# EAGLE board JoystickBulkBoard (EAGLE 9.0.0)
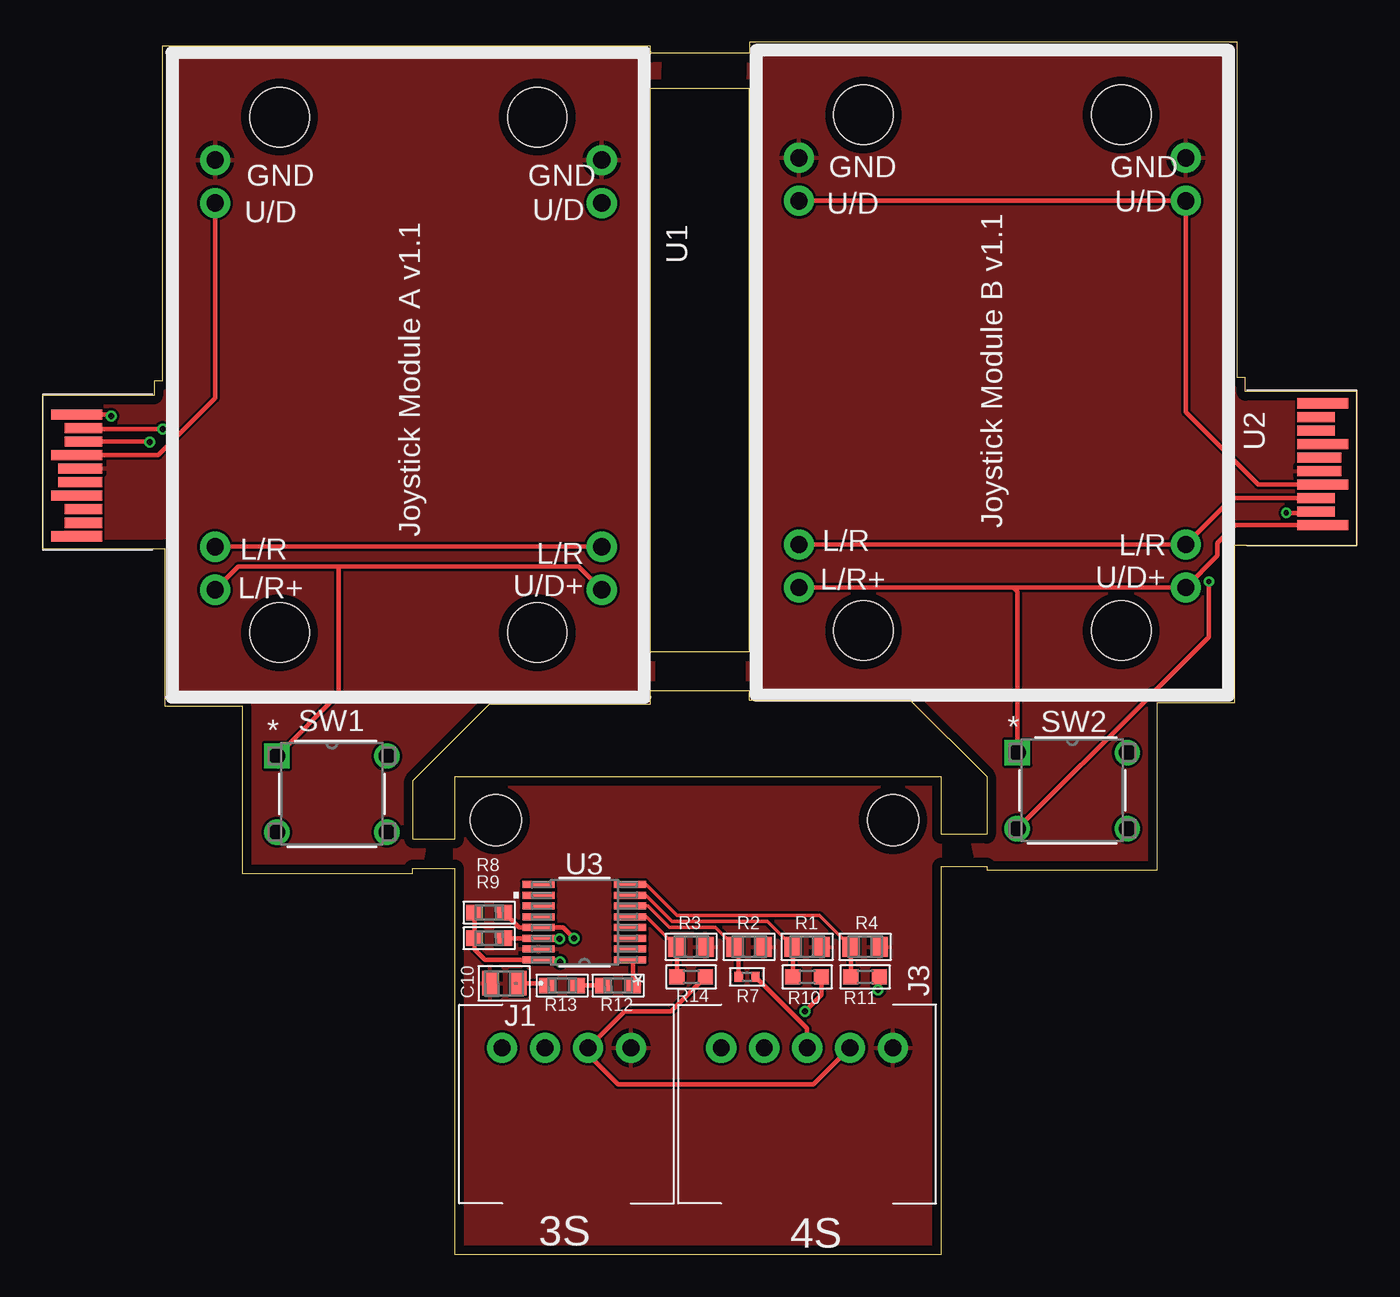
[diagram p0: board, top side]
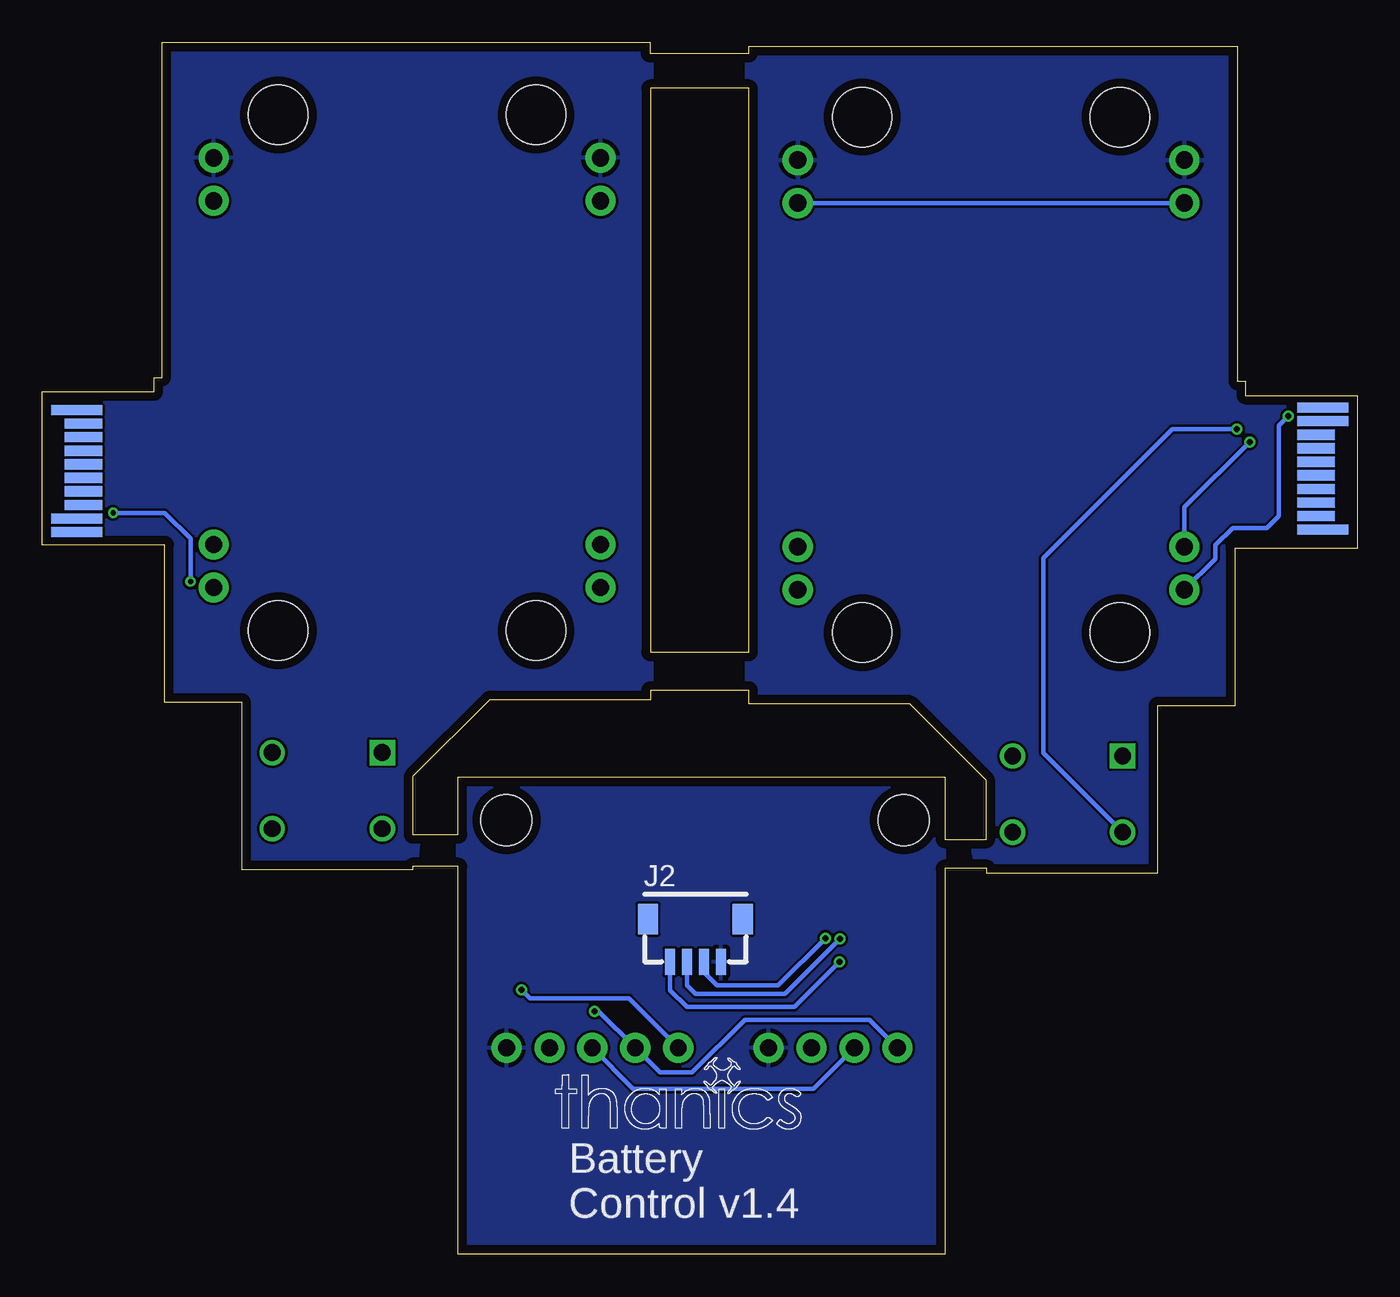
[diagram p1: board, bottom side, seen from below]

Size 77.72 x 71.65 mm. Coordinates in mm from the lower left corner, seen from the top.
Outline: 7.09,71.42 7.09,51.61 6.6,51.61 6.6,50.77 0,50.77 0,41.73 7.24,41.73 7.24,32.44 11.81,32.44 11.81,22.53 21.9,22.53 21.9,22.81 24.38,22.81 24.38,0 53.14,0 53.14,22.94 55.83,22.94 55.83,22.73 65.91,22.73 65.91,32.64 70.48,32.64 70.48,41.94 77.72,41.94 77.72,51 71.12,51 71.12,51.84 70.64,51.84 70.64,71.65 41.81,71.65 41.81,70.99 35.97,70.99 35.97,71.42 7.09,71.42
Outline: 35.97,68.94 41.78,68.94 41.78,35.61 35.97,35.61 35.97,68.94
Outline: 35.97,33.35 41.78,33.35 41.78,32.79 51.28,32.79 55.83,28.24 55.83,24.82 53.14,24.82 53.14,28.22 24.38,28.22 24.38,24.54 21.92,24.54 21.92,28.02 26.44,32.54 35.97,32.54 35.97,33.35
Copper layers (1*16): Top 0.035mm / dielectric 1.6mm / Bottom 0.035mm
Design rules "Elecrow_2-layer_PCB_eagle_rule": minimum track width 6mil, minimum drill 12mil, track to track 6mil, track to pad 6mil, pad to pad 6mil, via to via 8mil, smd to smd 0mil, copper to edge 20mil, drill to drill 10mil, minimum pad ring 6mil, minimum via ring 6mil, stop-mask expansion 0mil, vias tented up to drill 100mil, thermal gap 10mil
Holes 3 mm at 50.29,25.68 26.8,25.68

## Footprints (pad centres in the part's own frame; a part is rotated, then mirrored left to right if it is on the bottom)
0805 = smd 0.965 x 1.448: 1 -0.826,0; 2 0.826,0
JST-XH_4POS = drill 1 pad 1.778: 1 0,3.81; 2 0,1.27; 3 0,-1.27; 4 0,-3.81
JST_SH_4POS = smd 0.6 x 1.55: 1 -1.5,0; 2 -0.5,0; 3 0.5,0; 4 1.5,0 | smd 1.2 x 1.8: P$5 -2.8,2.525; P$6 2.8,2.525
JST-XH_5POS = drill 1 pad 1.778: 1 0,5.08; 2 0,2.54; 3 0,0; 4 0,-2.54; 5 0,-5.08
RC0805N = smd 1.006 x 1.2: 1 -0.853,0; 2 0.853,0
R0402 = smd 0.5 x 0.6: 1 -0.5,0; 2 0.5,0
RC0603N-M = smd 0.965 x 0.914: 1 -0.876,0; 2 0.876,0
R0603 = smd 0.9 x 0.9: 1 -0.85,0; 2 0.85,0
SW4_1825910-G = drill 0.991 pad 1.499 square: 1 -6.502,4.496 | drill 0.991 pad 1.499: 2 0,4.496; 3 -6.502,0; 4 0,0
27800-JOYSTICK = drill 1.016 pad 1.778: 1 -11.43,12.7; 2 -11.43,10.16; 3 11.43,12.7; 4 11.43,10.16; 5 -11.43,-10.16; 6 -11.43,-12.7; 7 11.43,-10.16; 8 11.43,-12.7 | hole 3.5: -7.62,15.24; 7.62,15.24; -7.62,-15.24; 7.62,-15.24
21-0055H_16-M = smd 1.905 x 0.406: 1 -2.705,2.223; 2 -2.705,1.587; 3 -2.705,0.953; 4 -2.705,0.318; 5 -2.705,-0.318; 6 -2.705,-0.953; 7 -2.705,-1.587; 8 -2.705,-2.223; 9 2.705,-2.223; 10 2.705,-1.587; 11 2.705,-0.953; 12 2.705,-0.318; 13 2.705,0.318; 14 2.705,0.953; 15 2.705,1.587; 16 2.705,2.223
EDGE_CONNECTOR_20POS_CONTACTS = smd 0.6 x 3 bottom: 1 -3.4,0; 9 3,0; 10 3.8,0 | smd 0.6 x 2.2 bottom: 2 -2.6,-0.4; 3 -1.8,-0.4; 4 -1,-0.4; 5 -0.2,-0.4; 6 0.6,-0.4; 7 1.4,-0.4; 8 2.2,-0.4 | smd 0.6 x 3: 11 3.4,0; 14 1,0; 17 -1.4,0; 20 -3.8,0 | smd 0.6 x 2.2: 12 2.6,-0.4; 13 1.8,-0.4; 18 -2.2,-0.4; 19 -3,-0.4 | smd 0.6 x 2.6: 15 0.2,-0.2; 16 -0.6,-0.2

## Placement (x,y rotation side)
C10  0.1uF  [0805]  27.3,16.03 180 top
J1  JST-XH_4POS  [JST-XH_4POS]  30.99,12.22 90 top
J2  [JST_SH_4POS]  39.12,17.3 0 bottom
J3  JST-XH_5POS  [JST-XH_5POS]  45.21,12.22 90 top
R1  10k 0.1%  [RC0805N]  45.21,18.19 180 top
R2  10k 0.1%  [RC0805N]  41.78,18.19 180 top
R3  10k 0.1%  [RC0805N]  38.35,18.19 180 top
R4  10k 0.1%  [RC0805N]  48.64,18.19 180 top
R7  15.6k  [R0402]  41.66,16.41 0 top
R8  1k  [RC0603N-M]  26.42,20.22 0 top
R9  1k  [RC0603N-M]  26.42,18.69 0 top
R10  28.4k  [R0603]  45.21,16.41 0 top
R11  41.2k  [R0603]  48.64,16.41 0 top
R12  1k  [RC0603N-M]  34.04,15.9 180 top
R13  1k  [RC0603N-M]  30.73,15.9 180 top
R14  2.74k  [R0603]  38.35,16.41 0 top
SW1  2-1825910-7  [SW4_1825910-G]  20.37,24.97 0 top
SW2  2-1825910-7  [SW4_1825910-G]  64.14,25.17 0 top
U1  27800-JOYSTICK  [27800-JOYSTICK]  21.64,51.99 180 top
U2  27800-JOYSTICK  [27800-JOYSTICK]  56.16,52.12 180 top
U3  MAX11608EEE+21-0055H_16-M  [21-0055H_16-M]  32.04,19.65 180 top
U$1  EDGE_CONNECTOR_20POS_CONTACTS  [EDGE_CONNECTOR_20POS_CONTACTS]  75.69,46.51 270 top
U$2  EDGE_CONNECTOR_20POS_CONTACTS  [EDGE_CONNECTOR_20POS_CONTACTS]  2.03,46.25 90 top

## Library data of the parts
C10 = Controller Board; COPYRIGHT: Copyright C 2015 Accelerated Designs. All rights reserved; MANUFACTURER_PART_NUMBER: 08055C104KAT2A; VENDOR: Vendor
J1 J3 = thanics-connector
J2 U1 U2 U$1 U$2 = thanics_robotics
R1-R4 = 10k-resistor; CASE: 0805 2012 metric; COMPOSITION: Thin Film; COPYRIGHT: Copyright C 2015 Accelerated Designs. All rights reserved; DATASHEET: httpindustrial.panasonic.comwwwcgijvcr13pz.cgi?E+PZ+3+AOA0026+ERA6AEB103V+7+WW; DIGIKEYPARTNUMBER: P10KDATRND; HEIGHT: 0.024" 0.60mm; LEADSTYLE: Surface Mount SMD SMT; MANUFACTURER_PART_NUMBER: ERA6AEB103V; NUMBEROFTERMINATIONS: 2; PACKAGECASE: 0805 2012 Metric; PACKAGING: Tape &amp Reel TR; POWERWATTS: 0.125W 18W; QUANTITY_AVAILABLE: 225000; RESISTANCEINOHMS: 10.0K; RESISTANCEOHMS: 10K; SIZEDIMENSION: 0.079" L x 0.049" W 2.00mm x 1.25mm; TEMPERATURECOEFFICIENT: 25ppm°C; TOLERANCE: 0.1%; VENDOR: Panasonic; VOLTAGEWORKING: 100V
R7 R10 R11 R14 = thanics-resistor; TOLERANCE: 0.1%
R8 R9 R12 R13 = Controller Board; CASE: 0603 1608 metric; COMPOSITION: Thick Film; COPYRIGHT: Copyright C 2015 Accelerated Designs. All rights reserved; DATASHEET: httpwww.yageo.comdocumentsrecentPYuRC0603_51_RoHS_L_4.pdf; DESCRIPTION: RES 1.0K OHM 110W 5% 0603 SMD; DIGIKEYPARTNUMBER: 3111.0KGRTRND; HEIGHT: 0.022" 0.55mm; LEADSTYLE: Surface Mount SMD SMT; MANUFACTURER_PART_NUMBER: RC0603JR071KL; NEWARKPARTNUMBER: 14M7231; NUMBEROFTERMINATIONS: 2; PACKAGECASE: 0603 1608 Metric; PACKAGING: Tape &amp Reel TR; POWERWATTS: 0.1W 110W; QUANTITY_AVAILABLE: 0; RESISTANCEINOHMS: 1.00K; RESISTANCEOHMS: 1K; SIZEDIMENSION: 0.063" L x 0.031" W 1.60mm x 0.80mm; TEMPERATURECOEFFICIENT: 100ppm°C; TOLERANCE: 5%; VENDOR: Yageo; VOLTAGEWORKING: 50V
SW1 SW2 = spst-tactile-switch; MANUFACTURER_PART_NUMBER: 218259107; VENDOR: TE Connectivity
U3 = 8ch ADC; COPYRIGHT: Copyright C 2015 Accelerated Designs. All rights reserved; DATAINTERFACE: I²C Serial; DATASHEET: httpdatasheets.maximic.comendsMAX11606MAX11611.pdf; DESCRIPTION: IC ADC SERIAL 10BIT 8CH 16QSOP; DIGIKEYPARTNUMBER: MAX11608EEE+ND; MANUFACTURER_PART_NUMBER: MAX11608EEE+; MOUNTINGTYPE: Surface Mount; NUMBEROFBITS: 10; NUMBEROFCONVERTERS: 1; NUMBEROFINPUTSANDTYPE: 8 SingleEnded Unipolar 8 SingleEnded Bipolar 4 Differential Unipolar 4 Differential Bipolar; OPERATINGTEMPERATURE: 40°C ~ 85°C; PACKAGECASE: 16SSOP 0.154" 3.90mm Width; PACKAGING: Tube; POWERDISSIPATIONMAX: 666.7mW; QUANTITY_AVAILABLE: 814; SAMPLINGRATEPERSECOND: 94.4k; SUPPLIERDEVICEPACKAGE: 16QSOP; VENDOR: Maxim Integrated Products; VOLTAGESUPPLYSOURCE: Single Supply

## Nets
+3V1: SW2.1 U2.1 U2.3 U$1.11
+3V2: J2.1 R8.1 R9.1 U3.16
+3V3: SW1.1 U1.1 U1.3 U$2.11
C1: R3.2 R14.1 U3.5
C2: R2.2 R7.1 U3.6
C3: R1.2 R10.1 U3.7
C4: R4.2 R11.1 U3.8
GND: U1.6 U1.8 U$2.15
GND1: U2.6 U2.8 U$1.15
GND2: C10.2 J1.4 J2.4 J3.5 R1.1 R2.1 R3.1 R4.1 U3.15
I2C_SCL: J2.3 R8.2 U3.13
I2C_SDA: J2.2 R9.2 U3.14
J2_SW: SW1.3 U$2.12
J2_SW1: SW2.3 U$1.12
N$1: R12.1 U3.1
N$8: J1.3 J3.4 R14.2
N$10: J1.2 J3.3 R7.2
N$13: J1.1 J3.2 R10.2
N$16: J3.1 R11.2
N$24: R12.2 R13.1
N$28: C10.1 R13.2
VRX: U1.2 U1.4 U$2.13
VRX1: U2.2 U2.4 U$1.13
VRY: U1.5 U1.7 U$2.14
VRY1: U2.5 U2.7 U$1.14

## Tracks (layer width: path | path; a pad name or v marks a point on that pad's centre or on a via)
+3V1
  Top 0.254: U$1.11 70.51,43.11 69.47,42.06 69.47,41.3 U2.1 57.4,39.42 | U2.3 57.4,39.42 | SW2.1 57.63,39.19 57.4,39.42
+3V2  (via drill 0.35)
  Top 0.254: R8.1 R9.1 25.54,18.05 26.16,17.42 U3.16 30.48,17.42 v30.61,17.3
  Bottom 0.254: J2.1 40.62,15.62 39.62,14.63 33.27,14.63 v30.61,17.3
+3V3  (via drill 0.35)
  Top 0.254: SW1.1 17.53,33.12 17.53,40.67 | 10.36,39.14 U1.3 11.58,40.67 17.53,40.67 | U1.1 31.7,40.67 17.53,40.67 | v4.06,49.56 3.97,49.65 U$2.11
  Bottom 0.254: U1.3 8.38,41.12 8.38,41.94 7.37,42.95 5.33,42.95 4.63,43.65 4.63,48.99 v4.06,49.56
C1
  Top 0.203: R3.2 35.72,19.96 U3.5
  Top 0.254: R14.1 R3.2
C2
  Top 0.203: R2.2 39.79,19.33 37.08,19.33 35.81,20.6 U3.6
  Top 0.254: R7.1 41.16,17.96 R2.2
C3
  Top 0.203: R1.2 42.86,19.69 37.24,19.69 35.69,21.23 U3.7
  Top 0.254: R10.1 R1.2
C4
  Top 0.203: U3.8 35.69,21.87 37.52,20.04 45.93,20.04 R4.2
  Top 0.254: R11.1 R4.2
GND
  pour Bottom: 3.56,73.69 3.56,21.62 22.35,22.12 23.62,28.98 36.07,31.78 36.07,74.19
  pour Top: 3.4,21.87 22.3,22.63 23.57,29.29 36.07,31.78 36.53,74.4 3.4,74.4
GND1
  pour Bottom: 41.66,82.14 74.35,81.97 74.35,22.91 55.63,22.33 55.12,27.97 41.66,32.79
  pour Top: 41.71,81.97 74.35,81.92 74.22,22.86 55.3,22.66 54.03,28.91 41.66,32.79
GND2
  pour Bottom: 24.38,28.22 53.21,28.22 53.21,0.03 24.38,0.03
  pour Top: 24.38,28.22 53.09,28.22 53.09,0.03 24.38,0.03
I2C_SCL  (via drill 0.35)
  Top 0.254: R8.2 28.18,19.33 U3.13 30.8,19.33 v31.43,18.69
  Bottom 0.254: v31.43,18.69 34.22,15.9 37.85,15.9 38.62,16.67 J2.3
I2C_SDA  (via drill 0.35)
  Top 0.254: R9.2 U3.14 29.37,18.66 v30.57,18.66
  Bottom 0.254: J2.2 39.62,15.89 39.12,15.39 33.84,15.39 v30.57,18.66
J2_SW  (via drill 0.35)
  Top 0.254: v7.11,48.79 2.49,48.79 U$2.12
  Bottom 0.254: SW1.3 18.54,29.64 18.54,41.17 10.92,48.79 v7.11,48.79
J2_SW1  (via drill 0.3)
  Top 0.254: v68.96,39.78 68.96,36.5 65.76,33.3 65.65,33.3 65.28,32.93 65.28,32.82 SW2.3 | v73.53,43.84 75.22,43.84 U$1.12
  Bottom 0.254: v68.96,39.78 68.96,42.32 70.48,43.84 v73.53,43.84
N$1
  Top 0.254: U3.1 34.91,17.26 R12.1
N$8
  Top 0.254: R14.2 37.17,14.38 34.42,14.38 J1.3 32.26,11.84 34.04,10.06 45.59,10.06 J3.4
N$10
  Top 0.254: R7.2 45.21,13.35 J3.3
  Bottom 0.254: J1.2 32.13,9.8 42.8,9.8 J3.3
N$13  (via drill 0.35)
  Top 0.254: v45.08,14.38 46.06,15.35 R10.2
  Bottom 0.254: v45.08,14.38 44.83,14.38 J3.2 41.21,10.76 39.31,10.76 36.2,13.87 28.83,13.87 J1.1
N$16  (via drill 0.35)
  Top 0.254: v49.4,15.65 49.49,15.73 R11.2
  Bottom 0.254: J3.1 43.05,15.14 48.89,15.14 v49.4,15.65
N$24
  Top 0.254: R12.2 R13.1
N$28
  Top 0.254: R13.2 29.73,16.03 C10.1
VRX  (via drill 0.35)
  Top 0.254: U1.2 U1.4 | U$2.13 6.33,48.05 v6.35,48.03
  Bottom 0.254: v6.35,48.03 10.21,44.17 U1.4
VRX1
  Top 0.254: U$1.13 70.34,44.71 U2.2 U2.4
VRY
  Top 0.254: U$2.14 6.84,47.25 10.21,50.62 U1.7
  Bottom 0.254: U1.7 U1.5
VRY1
  Top 0.254: U2.7 U2.5 67.59,49.78 71.87,45.51 U$1.14

## Text on the board
bPlace: Battery / Control v1.4
tNames: GND | GND | GND | GND | U/D | U/D | U/D | U/D | Joystick Module B v1.1 | Joystick Module A v1.1 | L/R | L/R | L/R | L/R | L/R+ | U/D+ | L/R+ | U/D+ | 3S | 4S